# Altium PCB EasyEDA_ZX64_rev0.pcbdoc (part 3 of 3)
Units mil, origin at the board's own origin, x right, y up, seen from the top; angles counter-clockwise.
Board outline 12792.03 x 5307.23 mil, 2 copper layers (Top Layer, Bottom Layer); 152 components, 165 nets, 989 pads, 228 vias.
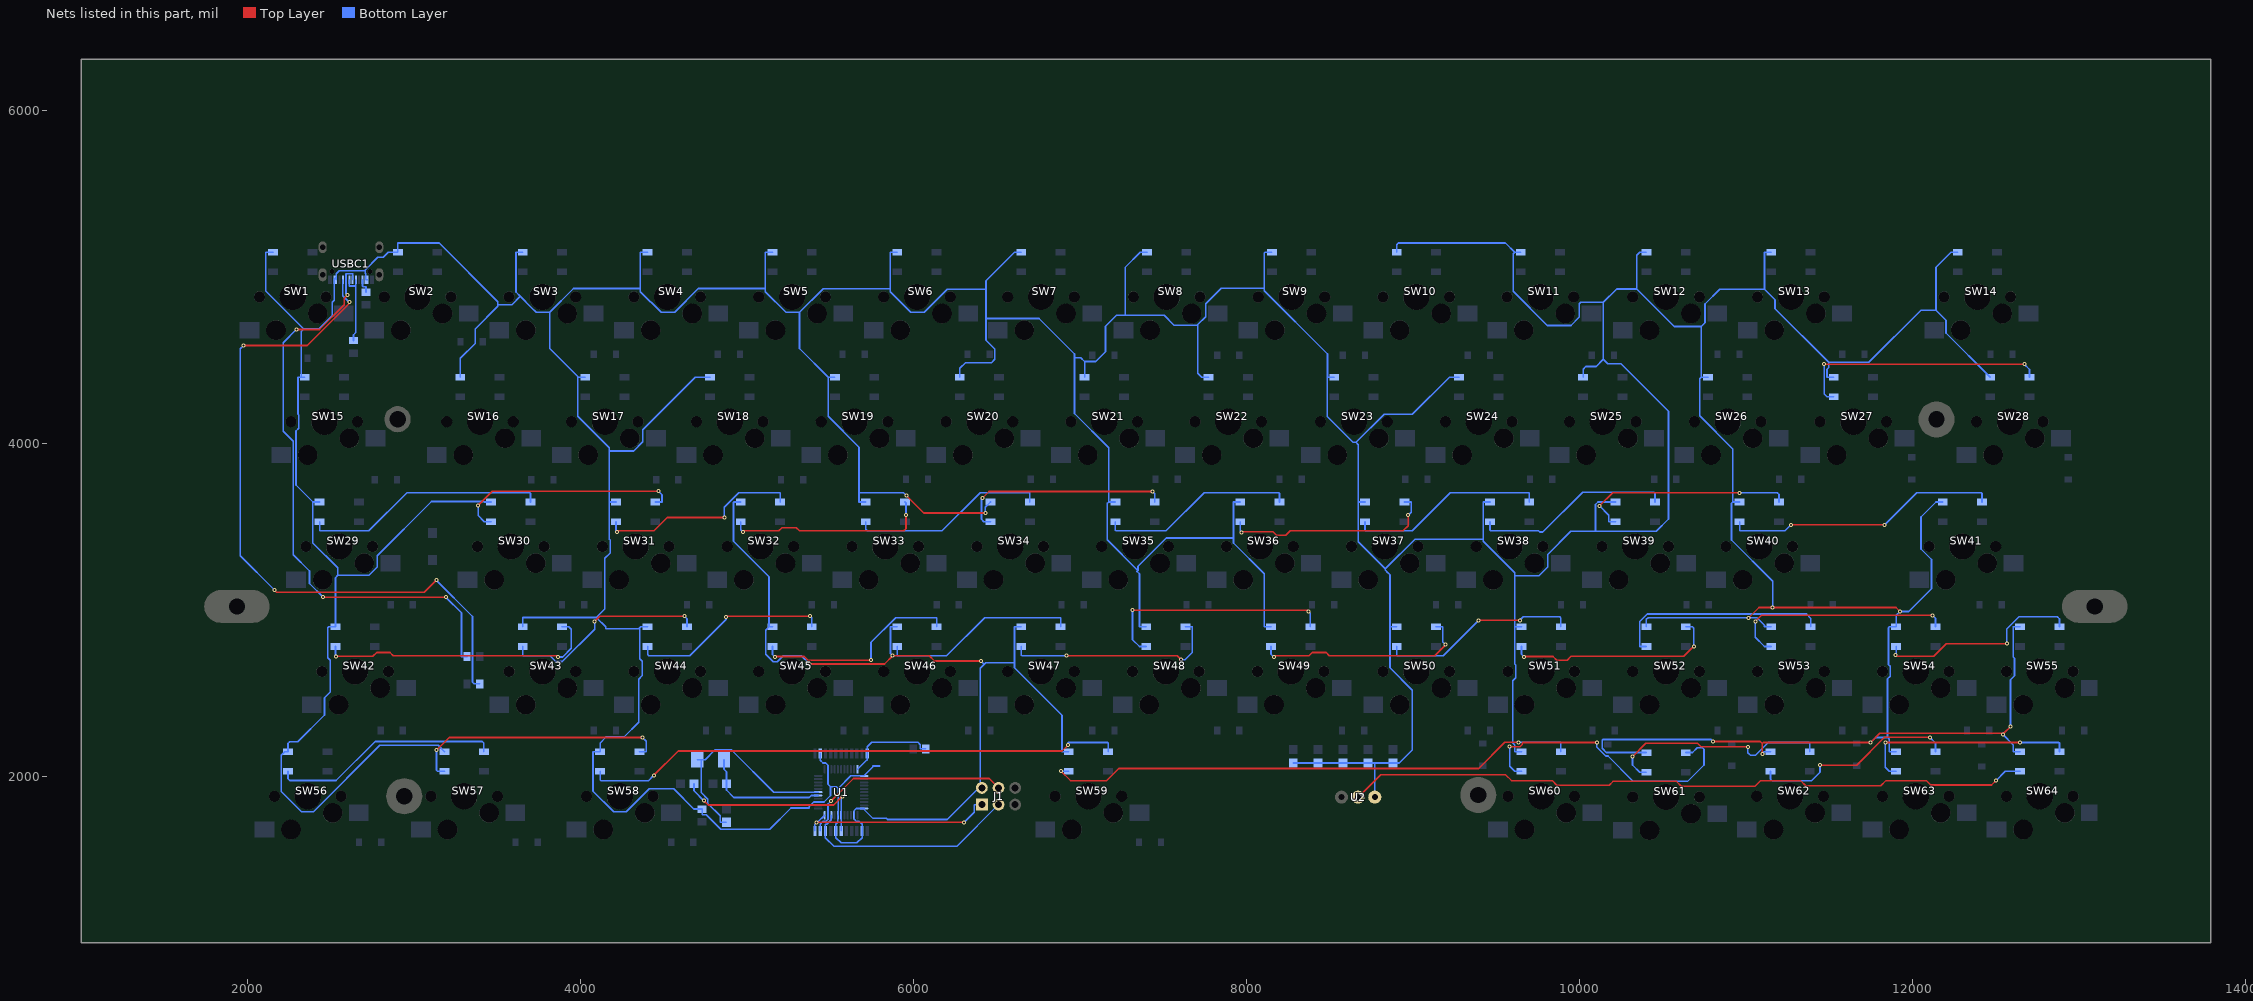
[diagram p3: the nets of this part, all layers, seen from the top]

## Via types
v1: diameter 24.02, hole 12.01, Top Layer to Bottom Layer, tented both sides, 228 vias

## Nets (pads, with @x,y where several pads share a name; then routed paths per layer and width w, separated by ;. In a path a pad name is that pad's centre, name@x,y a point inside that pad or via, vN(x,y) a via of type N, cw(c..) or ccw(c..) an arc to the next point about the centre after c; other vN are vias at no path point) (continued)
SW27_4: SW27.4 SW28.6 | length 1535.8
  Top Layer w10: v1(11469.71,4475.22) v1(12671.96,4475.22)
  Bottom Layer w10: v1(11469.71,4475.22) 11469.71,4296.43 11486.53,4279.61 SW27.4@11527.07,4279.61 ; v1(12671.96,4475.22) 12703.29,4443.89 SW28.6@12703.29,4397.72
SW29_4: SW29.4 SW30.6 | length 1468.1
  Bottom Layer w10: SW29.4@2432.07,3529.61 2432.07,3477.81 2435.7,3474.18 2727.54,3474.18 2956.51,3703.15 3695.38,3703.15 3698.29,3700.24 SW30.6@3698.29,3647.72
SW30_4: SW30.4 SW31.6 | length 1386.4
  Top Layer w10: v1(3384.38,3627.97) 3468.73,3712.32 v1(4467.71,3712.32)
  Bottom Layer w10: v1(3384.38,3627.97) 3384.38,3566.76 3421.53,3529.61 SW30.4@3462.07,3529.61 ; SW31.6@4448.29,3647.72 4488.78,3647.72 4488.78,3691.25 v1(4467.71,3712.32)
SW31_4: SW31.4 SW32.6 | length 1232.3
  Top Layer w10: v1(4219.26,3466.58) 4226.86,3474.18 4440.22,3474.18 4520.99,3554.95 v1(4862.69,3554.95)
  Bottom Layer w10: SW31.4@4212.07,3529.61 4212.07,3473.77 v1(4219.26,3466.58) ; v1(4862.69,3554.95) 4862.69,3615.55 4950.29,3703.15 5195.38,3703.15 5198.29,3700.24 SW32.6@5198.29,3647.72
SW32_4: SW32.4 SW33.6 | length 1233.5
  Top Layer w10: v1(4975.83,3466.74) 4983.27,3474.18 5190.22,3474.18 5209.46,3493.42 5295.19,3493.42 5314.43,3474.18 5940.22,3474.18 5953.83,3487.79 v1(5953.83,3568.16)
  Bottom Layer w10: SW32.4@4962.07,3529.61 4962.07,3480.5 v1(4975.83,3466.74) ; SW33.6@5948.29,3647.72 5953.83,3642.18 v1(5953.83,3568.16)
SW33_4: SW33.4 SW34.6 | length 1185.5
  Bottom Layer w10: SW33.4@5712.07,3529.61 5712.07,3484.3 5722.18,3474.19 6171,3474.19 6399.96,3703.15 6697.38,3703.15 6698.29,3702.24 SW34.6@6698.29,3647.72
SW34_4: SW34.4 SW35.6 | length 1297.2
  Top Layer w10: v1(6413.95,3672.2) 6452.67,3710.92 v1(7434.68,3710.92)
  Bottom Layer w10: v1(6413.95,3672.2) 6407.52,3665.77 6407.52,3543.62 6421.53,3529.61 SW34.4@6462.07,3529.61 ; v1(7434.68,3710.92) 7448.29,3697.31 SW35.6@7448.29,3647.72
SW35_4: SW35.4 SW36.6 | length 1188.1
  Bottom Layer w10: SW35.4@7212.07,3529.61 7212.07,3477.81 7215.7,3474.18 7516.29,3474.18 7745.26,3703.15 8195.38,3703.15 8198.29,3700.24 SW36.6@8198.29,3647.72
SW36_4: SW36.4 SW37.6 | length 1292.9
  Top Layer w10: v1(7970.91,3465.5) 7974.97,3469.56 8158.54,3469.56 8180.42,3447.68 8235.62,3447.68 8262.12,3474.18 8940.22,3474.18 8970.77,3504.73 v1(8970.77,3568.68)
  Bottom Layer w10: SW36.4@7962.07,3529.61 7962.07,3474.34 v1(7970.91,3465.5) ; SW37.6@8948.29,3647.72 8988.78,3647.72 8988.78,3586.69 v1(8970.77,3568.68)
SW37_4: SW37.4 SW38.6 | length 1188.1
  Bottom Layer w10: SW37.4@8712.07,3529.61 8712.07,3477.81 8715.7,3474.18 8995.11,3474.18 9224.08,3703.15 9695.38,3703.15 9698.29,3700.24 SW38.6@9698.29,3647.72
SW38_4: SW38.4 SW39.6 | length 1201.7
  Bottom Layer w10: SW38.4@9462.07,3529.61 9462.07,3477.81 9465.7,3474.18 9753.96,3474.18 9761.08,3467.06 9780.18,3467.06 10019.5,3706.38 10447.15,3706.38 10453.29,3700.24 SW39.6@10453.29,3647.72
SW39_4: SW39.4 SW40.6 | length 1318.6
  Top Layer w10: v1(10120.4,3624.43) 10199.12,3703.15 v1(10962.13,3703.15)
  Bottom Layer w10: v1(10120.4,3624.43) 10176.53,3568.3 10176.53,3529.61 SW39.4@10217.07,3529.61 ; v1(10962.13,3703.15) 11188.18,3703.15 11198.29,3693.04 SW40.6@11198.29,3647.72
SW40_4: SW40.4 SW41.6 | length 1658.6
  Top Layer w10: v1@11270.85,3510.62 v1(11833.3,3510.62)
  Bottom Layer w10: SW40.4@10962.07,3529.61 10962.07,3477.81 10965.7,3474.18 11234.41,3474.18 v1@11270.85,3510.62 ; v1(11833.3,3510.62) 12026.42,3703.74 12414.79,3703.74 12418.29,3700.24 SW41.6@12418.29,3647.72
  other v1: 11270.85,3510.62
SW42_4: SW42.4 SW43.6 | length 1692.7
  Top Layer w10: v1(2528.97,2720.47) 2751.48,2720.5 2774.48,2743.4 2854.28,2743.4 2873.58,2724.2 3411.58,2724.2 3855.18,2724.2 v1@3862.68,2716.7
  Bottom Layer w10: SW42.4@2527.07,2779.61 2527.07,2722.37 v1(2528.97,2720.47) ; v1@3862.73,2716.65 3892.1,2716.65 3943.85,2768.4 3943.85,2882.65 3928.78,2897.72 SW43.6@3888.29,2897.72
  other v1: 3862.73,2716.65
SW43_4: SW43.4 SW44.6 | length 1249.8
  Top Layer w10: v1(4083.81,2931.09) 4114.43,2961.71 v1(4623.01,2961.71)
  Bottom Layer w10: SW43.4@3652.07,2779.61 3652.07,2727.81 3655.7,2724.18 3815.82,2724.18 3850.87,2689.13 3889.41,2689.13 4083.81,2883.53 v1(4083.81,2931.09) ; v1(4623.01,2961.71) 4638.29,2946.43 SW44.6@4638.29,2897.72
SW44_4: SW44.4 SW45.6 | length 1201.6
  Top Layer w10: v1@4874.42,2957.25 4878.88,2961.71 v1(5378.16,2961.71)
  Bottom Layer w10: SW44.4@4402.07,2779.61 4402.07,2731.85 4409.74,2724.18 4655.01,2724.18 4874.42,2943.59 v1@4874.42,2957.25 ; v1(5378.16,2961.71) 5388.29,2951.58 SW45.6@5388.29,2897.72
  other v1: 4874.42,2957.25
SW45_4: SW45.4 SW46.6 | length 1274
  Top Layer w10: v1(5167.69,2715.56) 5171.69,2719.56 5343.6,2719.56 5365.48,2697.68 v1(5743.61,2697.68)
  Bottom Layer w10: SW45.4@5152.07,2779.61 5152.07,2731.18 v1(5167.69,2715.56) ; v1(5743.61,2697.68) 5743.61,2804.56 5892.2,2953.15 6135.38,2953.15 6138.29,2950.24 SW46.6@6138.29,2897.72
SW46_4: SW46.4 SW47.6 | length 1183.1
  Bottom Layer w10: SW46.4@5902.07,2779.61 5902.07,2727.81 5905.7,2724.18 6197.76,2724.18 6426.73,2953.15 6880.38,2953.15 6883.29,2950.24 SW47.6@6883.29,2897.72
SW47_4: SW47.4 SW48.6 | length 1302.6
  Top Layer w10: v1(6917.8,2724.18) 7583.24,2724.18 v1(7607.34,2700.08)
  Bottom Layer w10: SW47.4@6647.07,2779.61 6647.07,2727.81 6650.7,2724.18 v1(6917.8,2724.18) ; v1(7607.34,2700.08) 7630.09,2700.08 7673.85,2743.84 7673.85,2897.65 7673.78,2897.72 SW48.6@7633.29,2897.72
SW48_4: SW48.4 SW49.6 | length 1434
  Top Layer w10: v1(7314.98,2998.13) 8364.46,2998.13 v1@8373.34,2989.25
  Bottom Layer w10: v1(7314.98,2998.13) 7314.98,2821.16 7356.53,2779.61 SW48.4@7397.07,2779.61 ; v1@8373.34,2989.25 8383.29,2979.3 SW49.6@8383.29,2897.72
  other v1: 8373.34,2989.25
SW49_4: SW49.4 SW50.6 | length 1302.7
  Top Layer w10: v1(8163.95,2716.29) 8171.84,2724.18 8375.22,2724.18 8394.46,2743.42 8478.31,2743.42 8497.55,2724.18 9130.22,2724.18 9194.16,2788.12 v1(9194.16,2791.57)
  Bottom Layer w10: SW49.4@8147.07,2779.61 8147.07,2733.17 v1(8163.95,2716.29) ; SW50.6@9138.29,2897.72 9178.78,2897.72 9178.78,2806.95 v1(9194.16,2791.57)
SW50_4: SW50.4 SW51.6 | length 1193.5
  Top Layer w10: v1(9392.57,2936.54) v1@9641.65,2936.54
  Bottom Layer w10: SW50.4@8902.07,2779.61 8902.07,2727.81 8905.7,2724.18 9182.09,2724.18 9392.57,2934.66 v1(9392.57,2936.54) ; v1@9641.65,2936.54 9662.77,2957.66 9881.77,2957.66 9888.29,2951.14 SW51.6@9888.29,2897.72
  other v1: 9641.65,2936.54
SW51_4: SW51.4 SW52.6 | length 1293.4
  Top Layer w10: v1(9668.09,2716.89) 9670.76,2719.56 9841.44,2719.56 9863.32,2697.68 9925.62,2697.68 9948.84,2720.9 10626.94,2720.9 v1(10686.83,2780.79)
  Bottom Layer w10: SW51.4@9652.07,2779.61 9652.07,2732.91 v1(9668.09,2716.89) ; SW52.6@10638.29,2897.72 10678.78,2897.72 10686.83,2889.67 v1(10686.83,2780.79)
SW52_4: SW52.4 SW53.6 | length 1298.5
  Bottom Layer w10: SW52.4@10402.07,2779.61 10361.53,2779.61 10361.46,2779.68 10361.46,2929.45 10406.55,2974.54 11363.99,2974.54 11388.29,2950.24 SW53.6@11388.29,2897.72
SW53_4: SW53.4 SW54.6 | length 1370.2
  Top Layer w10: v1(11056.69,2930.2) 11093.5,2967.01 v1(12121.52,2967.01)
  Bottom Layer w10: v1(11056.69,2930.2) 11056.69,2834.45 11111.53,2779.61 SW53.4@11152.07,2779.61 ; v1(12121.52,2967.01) 12138.29,2950.24 SW54.6@12138.29,2897.72
SW54_4: SW54.4 SW55.6 | length 1242.9
  Top Layer w10: v1(11898.23,2729.56) 11906.16,2721.63 12127.67,2721.63 12202.42,2796.38 v1(12567.67,2796.38)
  Bottom Layer w10: v1(11898.23,2729.56) 11902.07,2733.4 SW54.4@11902.07,2779.61 ; v1(12567.67,2796.38) 12567.67,2885.48 12640.1,2957.91 12870.74,2957.91 12883.29,2945.36 SW55.6@12883.29,2897.72
SW56_4: SW56.4 SW57.6 | length 1379.5
  Bottom Layer w10: SW56.4@2242.07,2029.61 2242.07,1984.3 2252.18,1974.19 2530.38,1974.19 2765.58,2209.39 3409.14,2209.39 3418.29,2200.24 SW57.6@3418.29,2147.72
SW57_4: SW57.4 SW58.6 | length 1575.1
  Top Layer w10: v1(3133.91,2157.28) 3209.8,2233.17 v1(4370.64,2233.17)
  Bottom Layer w10: v1(3133.91,2157.28) 3133.91,2037.23 3141.53,2029.61 SW57.4@3182.07,2029.61 ; SW58.6@4353.29,2147.72 4393.78,2147.72 4393.78,2210.03 v1(4370.64,2233.17)
SW58_4: SW58.4 SW59.6 | length 3260.9
  Top Layer w10: v1(4439.36,2005.51) 4585.31,2151.46 6891.9,2151.46 v1@6927.09,2186.65
  Bottom Layer w10: SW58.4@4117.07,2029.61 4117.07,1977.81 4120.7,1974.18 4408.03,1974.18 v1(4439.36,2005.51) ; v1@6927.09,2186.65 6927.09,2199.92 6930.32,2203.15 7165.38,2203.15 7168.29,2200.24 SW59.6@7168.29,2147.72
  other v1: 6927.09,2186.65
SW59_4: SW59.4 SW60.6 | length 3225.4
  Top Layer w10: v1(6884.4,2031.84) 6942.06,1974.18 7160.22,1974.18 7232.38,2046.34 9393.99,2046.34 9551.38,2203.73 v1(9632.26,2203.73)
  Bottom Layer w10: v1(6884.4,2031.84) 6886.63,2029.61 6891.53,2029.61 SW59.4@6932.07,2029.61 ; v1(9632.26,2203.73) 9884.8,2203.73 9888.29,2200.24 SW60.6@9888.29,2147.72
SW60_4: SW60.4 SW61.6 | length 1758.2
  Top Layer w10: v1(9580.99,2177.9) 9643.16,2177.9 9655.7,2190.44 9655.7,2200.24 9658.6,2203.14 v1(10104.19,2203.14)
  Bottom Layer w10: v1(9580.99,2177.9) 9580.99,2060.15 9611.53,2029.61 SW60.4@9652.07,2029.61 ; v1(10104.19,2203.14) 10104.19,2176.28 10158.36,2122.11 10171.01,2122.11 10323.94,1969.18 10649.07,1969.18 10747.86,2067.97 10747.86,2162.95 10739.27,2171.54 10707.6,2171.54 10678.78,2142.72 SW61.6@10638.29,2142.72
SW61_4: SW61.4 SW62.6 | length 1386.2
  Top Layer w10: v1(10318.72,2118.02) 10398.85,2198.15 10708.63,2198.15 10729.71,2177.07 v1(11011.35,2177.07)
  Bottom Layer w10: v1(10318.72,2118.02) 10318.72,2067.42 10361.53,2024.61 SW61.4@10402.07,2024.61 ; v1(11011.35,2177.07) 11011.35,2141.7 11027.65,2125.4 11056.98,2125.4 11134.73,2203.15 11380.38,2203.15 11383.29,2200.24 SW62.6@11383.29,2147.72
SW62_4: SW62.4 SW63.6 | length 1239.9
  Top Layer w10: v1(11444.72,2067.03) 11664.84,2067.03 11831.83,2234.02 v1(12104.51,2234.02)
  Bottom Layer w10: SW62.4@11147.07,2029.61 11147.07,1984.14 11157.03,1974.18 11394.52,1974.18 11444.72,2024.38 v1(11444.72,2067.03) ; v1(12104.51,2234.02) 12138.29,2200.24 SW63.6@12138.29,2147.72
SW63_4: SW63.4 SW64.6 | length 1323.5
  Top Layer w10: v1(11837.3,2203.15) v1(12646.73,2203.15)
  Bottom Layer w10: v1(11837.3,2203.15) 11837.3,2053.84 11861.53,2029.61 SW63.4@11902.07,2029.61 ; v1(12646.73,2203.15) 12879.8,2203.15 12883.29,2199.66 SW64.6@12883.29,2147.72
SW64_4: SW64.4 U2.2 | length 4165.5
  Top Layer w10: U2.2@8670.18,1875 8805.31,2010.13 9555.57,2010.13 9591.52,1974.18 9835.88,1974.18 9863.37,1946.69 10178.76,1946.69 10201.25,1969.18 10583.24,1969.18 10612.25,1940.17 11054.44,1940.17 11088.45,1974.18 11328.24,1974.18 11359.36,1943.06 11809.83,1943.06 11840.95,1974.18 12083.24,1974.18 12110.02,1947.4 12475.6,1947.4 v1(12503.19,1974.99)
  Bottom Layer w10: v1(12503.19,1974.99) 12557.81,2029.61 SW64.4@12647.07,2029.61
U1_6: C6.2 U1.6 | length 1200.1
  Top Layer w10: v1(4740.24,1853.34) 4766.03,1827.55 5519.57,1827.55 v1(5571.53,1879.51)
  Bottom Layer w10: C6.2@4680.73,1955 4680.73,1912.85 v1(4740.24,1853.34) ; U1.6@5564.59,1672.12 5564.59,1692.38 5564.59,1712.64 5564.51,1712.72 U1.6@5564.51,1766.7 5564.51,1872.49 v1(5571.53,1879.51)
U1_9: J1.3 U1.9 | length 1319.9
  Bottom Layer w10: U1.9@5505.45,1766.7 5505.45,1739.21 5478.88,1712.64 5470.1,1712.64 5470.1,1692.38 U1.9@5470.1,1672.12 5470.1,1631.61 5521.67,1580.04 6260.22,1580.04 J1.3@6510.18,1830
U1_10: J1.4 U1.10 | length 1302.6
  Top Layer w10: v1(5504.58,1852.51) 5638.62,1986.55 6453.63,1986.55 J1.4@6510.18,1930
  Bottom Layer w10: U1.10@5438.6,1672.12 5438.6,1712.64 5454.65,1728.69 5472.22,1728.69 5485.77,1742.24 U1.10@5485.77,1766.7 5485.77,1833.7 v1(5504.58,1852.51)
U1_11: J1.1 U1.11 | length 1187.6
  Top Layer w10: v1(5416.55,1723.26) v1(6303.44,1723.26)
  Bottom Layer w10: U1.11@5407.11,1672.12 5407.11,1692.38 5407.11,1712.64 5416.55,1722.08 v1(5416.55,1723.26) 5422.64,1723.26 U1.11@5466.08,1766.7 ; v1(6303.44,1723.26) 6363.76,1783.58 6363.76,1830 J1.1@6410.18,1830
U1_16: C7.2 U1.16 X1.1 | length 763.1
  Bottom Layer w10: X1.1@4860.89,2100 4860.89,2041.76 4875.73,2026.92 C7.2@4875.73,1955 4875.73,1917.44 4920.26,1872.91 U1.16@5332.3,1872.91 5372.82,1872.91 5384.72,1884.81 U1.16@5426.71,1884.81
U1_17: C8.2 U1.17 X1.2 | length 1316.9
  Bottom Layer w10: X1.2@4699.47,2100 X1.2@4723.67,2100 ; C8.2@4875.18,1724.45 4837.62,1724.45 4837.62,1762.01 4763.3,1836.33 4763.3,1862.9 4723.67,1902.53 X1.2@4723.67,2100 ; U1.17@5426.71,1904.49 5426.63,1904.41 U1.17@5332.3,1904.41 5160.31,1904.41 4906.42,2158.3 4806.16,2158.3 4747.86,2100 X1.2@4723.67,2100
U1_33: R2.1 U1.33 | length 555.4
  Bottom Layer w10: U1.33@5662.93,2042.29 5716.82,2096.18 5722.07,2096.18 5722.07,2135.77 U1.33@5722.07,2136.69 5722.07,2177.21 5748.68,2203.82 6026.08,2203.82 6039.94,2189.96 6039.94,2165 R2.1@6073.22,2165
USBC1_A5: R5.1 USBC1.A5 | length 4217.6
  Top Layer w10: v1(1974.92,4588.1) 2357.81,4588.1 2610.11,4840.4 v1(2610.11,4848.11) ; v1(2160.37,3119.19) 2173.28,3106.28 3060.44,3106.28 v1(3132.48,3178.32)
  Bottom Layer w10: v1(1974.92,4588.1) 1955.52,4568.7 1955.52,3324.04 v1(2160.37,3119.19) ; USBC1.A5@2570.97,4982.2 2570.97,4887.25 v1(2610.11,4848.11) ; v1(3132.48,3178.32) 3350.49,2960.31 3350.49,2564.45 3359.94,2555 R5.1@3393.22,2555
USBC1_B5: R4.2 USBC1.B5 | length 92.7
  Bottom Layer w10: USBC1.B5@2689.08,4982.2 2689.08,4945.62 2693.37,4941.33 2710.18,4941.33 R4.2@2710.18,4908.04
USBC1_B6: R3.1 USBC1.A6 USBC1.B6 | length 445.8
  Bottom Layer w10: USBC1.A6@2610.34,4982.2 2610.34,4945.62 2610.82,4945.14 2649.23,4945.14 ; R3.1@2635.18,4618.04 2635.18,4651.33 2649.23,4665.38 2649.23,4945.14 ; USBC1.B6@2649.71,4982.2 2649.71,4945.62 2649.23,4945.14
USBC1_B7: R6.2 USBC1.A7 USBC1.B7 | length 3528.6
  Top Layer w10: v1(2291.92,4683.76) 2430.76,4683.76 2579.15,4832.15 2579.15,4871.18 v1(2599.4,4891.43) ; v1(2452.96,3076.31) v1(3189.9,3076.31)
  Bottom Layer w10: v1(2291.92,4683.76) 2212.64,4604.48 2212.64,4072.75 2273.63,4011.76 2273.63,3330.58 2370.83,3233.38 2370.83,3158.44 v1(2452.96,3076.31) ; v1(2599.4,4891.43) 2590.65,4900.18 2590.65,4982.2 2590.65,5000.49 2590.65,5018.78 2590.72,5018.85 2629.95,5018.85 2630.02,5018.78 2630.02,5000.49 USBC1.A7@2630.02,4982.2 ; v1(3189.9,3076.31) 3283.85,2982.36 3283.85,2720 R6.2@3317.14,2720
VCC: C1.2 C2.2 C3.2 C4.2 C5.2 J1.2 R1.1 SW1.3 SW2.3 SW3.3 SW4.3 SW5.3 SW6.3 SW7.3 SW8.3 SW9.3 SW10.3 SW11.3 SW12.3 SW13.3 SW14.3 SW15.3 SW16.3 SW17.3 SW18.3 SW19.3 SW20.3 SW21.3 SW22.3 SW23.3 SW24.3 SW25.3 SW26.3 SW27.3 SW28.3 SW29.3 SW30.3 SW31.3 SW32.3 SW33.3 SW34.3 SW35.3 SW36.3 SW37.3 SW38.3 SW39.3 SW40.3 SW41.3 SW42.3 SW43.3 SW44.3 SW45.3 SW46.3 SW47.3 SW48.3 SW49.3 SW50.3 SW51.3 SW52.3 SW53.3 SW54.3 SW55.3 SW56.3 SW57.3 SW58.3 SW59.3 SW60.3 SW61.3 SW62.3 SW63.3 SW64.3 U1.2 U1.7 U1.14 U1.24 U1.34 U1.44 U2.3 USBC1.A4 USBC1.A9 USBC1.B4 USBC1.B9 | length 62607.8
  Top Layer w10: v1(5375.18,2674.56) 5824.91,2674.56 v1(5874.53,2724.18) 6093.72,2724.18 6125.59,2692.31 v1(6404.7,2692.31) ; v1(5956.04,3687.01) 6061.81,3581.24 v1(6430.58,3581.24) ; v1(10802.49,2209) 11085.72,2209 11098,2196.72 ; v1(11015.55,2950.89) 11078.53,3013.87 v1(11160.87,3013.87) 11901.8,3013.87 v1(11925.6,2990.07) ; v1(11098,2133.23) 11098,2196.72 ; v1(12543.07,2251.72) v1@12543.07,2258.18 ; v1(12589.49,2298.14) 12549.53,2258.18 v1@12543.07,2258.18 ; 11098,2196.72 11104.43,2203.15 v1(11748.78,2203.15) 11803.81,2258.18 v1@12543.07,2258.18
  Bottom Layer w10: SW1.3@2152.07,5147.72 2111.53,5147.72 2108.81,5145 2108.81,4914.72 2336.8,4686.73 ; SW15.3@2342.07,4397.72 SW15.3@2321.8,4397.72 ; SW29.3@2432.07,3647.72 2391.53,3647.72 ; USBC1.B9@2531.59,4982.2 USBC1.B9@2531.6,4998.27 ; USBC1.A9@2720.58,4982.2 USBC1.B4@2708.76,4982.2 2708.76,5018.78 2706.35,5021.19 2706.35,5036.49 ; SW57.3@3182.07,2147.72 3143.55,2186.24 2793.83,2186.24 2394.67,1787.08 2323.14,1787.08 2201.31,1908.91 2201.31,2127.23 2221.8,2147.72 SW56.3@2242.07,2147.72 2242.07,2196.59 2252.83,2207.35 2300.03,2207.35 2460.91,2368.23 2460.91,2471.29 2496.14,2506.52 2496.14,2697.22 2480.87,2712.49 2480.87,2892.06 2486.53,2897.72 SW42.3@2527.07,2897.72 2527.07,3193.3 2540.51,3206.74 ; SW16.3@3277.07,4397.72 3277.07,4511.1 3365.99,4600.02 3365.99,4687.03 3502.29,4823.33 3502.29,4831.62 ; SW30.3@3462.07,3647.72 3421.53,3647.72 3418.22,3651.03 3104.38,3651.03 2778.45,3325.1 2778.45,3257.25 2727.94,3206.74 2540.51,3206.74 ; SW43.3@3652.07,2897.72 3652.07,2953.09 3653.13,2954.15 4093.83,2954.15 ; SW3.3@3652.07,5147.72 3611.53,5147.72 3611.11,5147.3 3611.11,4909.11 3637.39,4882.84 ; SW17.3@4027.07,4397.72 3986.53,4397.72 ; SW31.3@4212.07,3647.72 4171.53,3647.72 ; SW44.3@4402.07,2897.72 4361.53,2897.72 4355.33,2891.52 ; SW4.3@4402.07,5147.72 4361.53,5147.72 4358.8,5144.99 4358.8,4930.06 ; SW18.3@4777.07,4397.72 4688.93,4397.72 4373.45,4082.24 4373.45,4008.93 4318.72,3954.2 4171.53,3954.2 ; SW32.3@4962.07,3647.72 4921.53,3647.72 4918.22,3644.41 4918.22,3412.83 5131.8,3199.25 SW45.3@5131.8,2897.72 ; SW45.3@5152.07,2897.72 SW45.3@5131.8,2897.72 ; SW5.3@5152.07,5147.72 5111.53,5147.72 5108.8,5144.99 5108.8,4930.06 ; v1(5375.18,2674.56) 5325.56,2724.18 5217.09,2724.18 5180.78,2687.87 5156.95,2687.87 5111.46,2733.36 5111.46,2877.38 SW45.3@5131.8,2897.72 ; U1.24@5438.6,2136.69 5438.6,2096.18 5455.25,2079.53 5472.82,2079.53 5485.77,2066.58 U1.24@5485.77,2042.29 5485.77,1952.82 5500.95,1937.64 ; SW19.3@5527.07,4397.72 5486.53,4397.72 ; SW33.3@5712.07,3647.72 5671.53,3647.72 5671.53,3704.16 ; U1.34@5796.87,2061.89 5756.35,2061.89 5756.35,2056.97 U1.34@5702.3,2002.92 5623.35,2002.92 5547.54,1927.11 ; v1(5874.53,2724.18) 5861.46,2737.25 5861.46,2897.65 5861.53,2897.72 SW46.3@5902.07,2897.72 ; SW6.3@5902.07,5147.72 5861.53,5147.72 5859.66,5145.85 5859.66,4929.36 ; v1(5956.04,3687.01) 5938.89,3704.16 5671.53,3704.16 ; SW20.3@6277.07,4397.72 6277.07,4450.52 6311.19,4484.64 6467.42,4484.64 6487.03,4504.25 6487.03,4567.05 6434.83,4619.25 6434.83,4750.12 ; v1(6404.7,2692.31) 6424.32,2672.69 ; J1.2@6410.18,1930 J1.2@6401.11,1939.07 ; v1(6430.58,3581.24) 6430.58,3616.23 SW34.3@6462.07,3647.72 ; SW47.3@6647.07,2897.72 6606.53,2897.72 6606.46,2897.65 6606.46,2681.65 ; SW7.3@6647.07,5147.72 6606.53,5147.72 6434.83,4976.02 6434.83,4925.55 ; SW59.3@6932.07,2147.72 6891.53,2147.72 6891.53,2366.67 6606.46,2651.74 6606.46,2681.65 ; SW21.3@7027.07,4397.72 7027.07,4491.46 ; SW35.3@7212.07,3647.72 7171.53,3647.72 ; SW48.3@7397.07,2897.72 7356.53,2897.72 7356.53,3215.76 7342.32,3229.97 7347.94,3235.59 ; SW8.3@7402.07,5147.72 7361.53,5147.72 7270.39,5056.58 7270.39,4768.66 ; SW22.3@7772.07,4397.72 7731.53,4397.72 7707.85,4421.4 7707.85,4708.99 ; SW36.3@7962.07,3647.72 7921.53,3647.72 7921.46,3647.65 7921.46,3431.11 ; SW49.3@8147.07,2897.72 8106.53,2897.72 8106.53,3216.67 7921.46,3401.74 7921.46,3431.11 ; SW9.3@8152.07,5147.72 8111.53,5147.72 8106.79,5142.98 8106.79,4931.18 ; C1.2@8280.18,2079.45 8430.18,2079.45 8580.18,2079.45 8730.18,2079.45 8770.18,2079.45 ; SW23.3@8527.07,4397.72 8486.53,4397.72 ; SW37.3@8712.07,3647.72 8671.53,3647.72 ; U2.3@8770.18,1875 8770.18,2079.45 ; 8834.02,3246.85 8834.02,3239.18 8842.77,3230.43 8842.77,3229.52 8861.5,3210.79 8861.5,2897.72 8861.46,2897.68 8861.46,2651.74 8995.67,2517.53 8995.67,2157.37 8917.75,2079.45 8880.18,2079.45 8770.18,2079.45 ; 8861.53,2897.72 SW50.3@8902.07,2897.72 ; SW10.3@8902.07,5147.72 8902.07,5193.03 8912.18,5203.14 9555.08,5203.14 9610.5,5147.72 ; SW24.3@9277.07,4397.72 9236.53,4397.72 9218.87,4397.72 8996.32,4175.17 8827.35,4175.17 8657.83,4005.65 ; SW38.3@9462.07,3647.72 9421.53,3647.72 9421.46,3647.65 9421.46,3424.56 ; SW11.3@9647.07,5147.72 9610.5,5147.72 ; SW60.3@9652.07,2147.72 9611.53,2147.72 9611.53,2188.26 9598.78,2201.01 9598.78,2573.4 9617,2591.62 9617,2669.02 9611.46,2674.56 9611.46,2897.65 9611.53,2897.72 ; SW51.3@9652.07,2897.72 9611.53,2897.72 ; SW25.3@10022.07,4397.72 10022.07,4445.92 10037.7,4461.55 10100.32,4461.55 10143.16,4504.39 ; SW39.3@10217.07,3647.72 10176.53,3647.72 10111.08,3647.72 10095.8,3632.44 10095.8,3471.87 ; SW61.3@10402.07,2142.72 10161.77,2142.72 10136.48,2168.01 10136.48,2218.48 10139.39,2221.39 10790.1,2221.39 v1(10802.49,2209) ; SW52.3@10402.07,2897.72 10402.07,2943.03 10412.3,2953.26 v1@11015.55,2953.26 ; SW12.3@10402.07,5147.72 10361.53,5147.72 10343.87,5130.06 10343.87,4927.06 ; SW26.3@10772.07,4397.72 10731.53,4397.72 ; SW40.3@10962.07,3647.72 10921.53,3647.72 ; v1(11015.55,2950.89) v1@11015.55,2953.26 ; v1(11098,2133.23) 11106.53,2141.76 11106.53,2147.72 SW62.3@11147.07,2147.72 ; SW53.3@11152.07,2897.72 11111.53,2897.72 11111.53,2907.99 11066.26,2953.26 v1@11015.55,2953.26 ; SW13.3@11152.07,5147.72 11111.53,5147.72 11111.46,5147.65 11111.46,4925.82 ; v1(11160.87,3013.87) 11160.87,3171.57 10913.4,3419.04 10913.4,3639.59 10921.53,3647.72 ; SW27.3@11527.07,4397.72 11486.53,4397.72 11486.53,4445.76 11496.66,4455.89 11496.66,4486.3 ; v1(11748.78,2203.15) 11778.91,2233.28 11849.97,2233.28 ; SW63.3@11902.07,2147.72 11861.53,2147.72 11861.53,2221.72 11849.97,2233.28 ; SW41.3@12182.07,3647.72 12141.53,3647.72 12051.68,3557.87 12051.68,3365.42 12114.62,3302.48 12114.62,3125.86 11978.83,2990.07 v1(11925.6,2990.07) 11902.07,2966.54 SW54.3@11902.07,2897.72 11861.53,2897.72 11856.29,2892.48 11856.29,2669.99 11866.09,2660.19 11866.09,2601.47 11849.97,2585.35 11849.97,2233.28 ; SW14.3@12272.07,5147.72 12231.53,5147.72 12141.7,5057.89 12141.7,4800.35 ; SW28.3@12467.07,4397.72 12201.73,4663.06 12201.73,4740.32 12141.7,4800.35 ; v1(12543.07,2251.72) 12606.53,2188.26 12606.53,2147.72 SW64.3@12647.07,2147.72 ; v1(12589.49,2298.14) 12589.49,2579.87 12613.24,2603.62 12613.24,2709.26 12605.68,2716.82 12605.68,2896.87 12606.53,2897.72 SW55.3@12647.07,2897.72 ; SW15.3@2321.8,4397.72 2321.8,4671.73 2336.8,4686.73 ; SW15.3@2321.8,4397.72 2301.53,4397.72 2301.46,4397.65 2301.46,4174.56 2307,4169.02 2307,4091.62 2289.69,4074.31 2289.69,3749.56 2391.53,3647.72 ; 2336.8,4686.73 2426.57,4686.73 2506.75,4766.91 2506.75,4847.24 2519.79,4860.28 USBC1.A4@2519.79,4982.2 2519.79,4986.46 USBC1.B9@2531.6,4998.27 ; 2391.53,3647.72 2391.46,3647.65 2391.46,3401.74 2540.51,3252.69 2540.51,3206.74 ; USBC1.B9@2531.6,4998.27 2531.6,5018.78 2549.31,5036.49 2706.35,5036.49 ; 2706.35,5036.49 2706.35,5041.59 2781.84,5117.08 2813.34,5117.08 2843.98,5147.72 2861.53,5147.72 SW2.3@2902.07,5147.72 2902.07,5203.09 2902.12,5203.14 3150.58,5203.14 3502.29,4851.43 3502.29,4831.62 ; 3502.29,4831.62 3586.17,4831.62 3637.39,4882.84 ; 3637.39,4882.84 3704.95,4815.27 3733.15,4787.08 3814.24,4787.08 ; 3814.24,4787.08 3957.22,4930.06 4358.8,4930.06 ; 3814.24,4787.08 3814.24,4570.01 3986.53,4397.72 ; 3986.53,4397.72 3983.04,4394.23 3983.04,4162.18 4171.53,3973.69 4171.53,3954.2 ; 4093.83,2954.15 4150.26,2897.72 4150.26,2885.32 4349.13,2885.32 4355.33,2891.52 ; 4093.83,2954.15 4144.62,3004.94 4144.62,3309.24 4177,3341.62 4177,3419.02 4171.46,3424.56 4171.46,3647.65 4171.53,3647.72 ; 4171.53,3647.72 4171.53,3954.2 ; 4355.33,2891.52 4355.33,2706.11 4369.76,2691.68 4369.76,2605.14 4348.21,2583.59 4348.21,2323.86 4259.96,2235.61 4152.45,2235.61 4117.07,2200.23 SW58.3@4117.07,2147.72 4076.53,2147.72 4074.47,2145.66 4074.47,1910.77 4199.06,1786.18 4274.35,1786.18 4412.83,1924.66 4558.56,1924.66 4680.18,1803.04 R1.1@4730.18,1803.04 4730.18,1769.76 4754.38,1769.76 4841.81,1682.33 5135.48,1682.33 5263.07,1809.92 U1.14@5332.3,1809.92 5372.82,1809.92 5372.82,1818.7 5399.56,1845.44 U1.14@5426.71,1845.44 5462.12,1845.44 5500.95,1884.27 5500.95,1937.64 ; 4358.8,4930.06 4358.8,4911.42 4483.14,4787.08 4564.24,4787.08 4707.22,4930.06 5108.8,4930.06 ; 5108.8,4930.06 5108.8,4911.42 5233.14,4787.08 5314.24,4787.08 ; 5314.24,4787.08 5314.24,4570.01 5486.53,4397.72 ; 5314.24,4787.08 5456.52,4929.36 5859.66,4929.36 ; 5486.53,4397.72 5486.46,4397.65 5486.46,4162.08 5671.53,3977.01 5671.53,3704.16 ; 5500.95,1937.64 5537.01,1937.64 5547.54,1927.11 ; 5547.54,1927.11 5547.54,1769.42 U1.7@5544.82,1766.7 5544.82,1724.37 5533.09,1712.64 5533.09,1692.38 U1.7@5533.09,1672.12 5533.09,1631.61 5564.6,1600.1 5659.06,1600.1 5690.57,1631.61 U1.2@5690.57,1672.12 5690.57,1712.64 5674.42,1728.79 5657.02,1728.79 5643.25,1742.56 U1.2@5643.25,1766.7 5643.25,1794.31 5655.01,1806.07 U1.44@5702.3,1806.07 5702.3,1800.98 5756.35,1746.93 5776.61,1746.93 U1.44@5796.87,1746.93 5837.39,1746.93 5843.53,1740.79 6202.83,1740.79 J1.2@6401.11,1939.07 ; 5859.66,4929.36 5859.66,4910.56 5983.14,4787.08 6064.24,4787.08 6202.71,4925.55 6434.83,4925.55 ; J1.2@6401.11,1939.07 6401.11,2649.48 6424.32,2672.69 ; 6424.32,2672.69 6433.28,2681.65 6606.46,2681.65 ; 6434.83,4750.12 6753.05,4750.12 6966.43,4536.74 6966.43,4514.1 ; 6434.83,4750.12 6434.83,4925.55 ; 6966.43,4514.1 6966.43,4178.8 7171.53,3973.7 7171.53,3647.72 ; 6966.43,4514.1 7004.43,4514.1 7027.07,4491.46 ; 7027.07,4491.46 7094.6,4491.46 7153.21,4550.07 7153.21,4702.75 7219.12,4768.66 7270.39,4768.66 ; 7171.53,3647.72 7163.07,3639.26 7163.07,3420.46 7347.94,3235.59 ; 7270.39,4768.66 7504.87,4768.66 7564.54,4708.99 7707.85,4708.99 ; 7347.94,3235.59 7347.94,3260.77 7518.28,3431.11 7921.46,3431.11 ; 7707.85,4708.99 7707.85,4713.44 7754.41,4760 7754.41,4838.2 7847.39,4931.18 8106.79,4931.18 ; 8106.79,4931.18 8106.79,4916.74 8486.53,4537 8486.53,4397.72 ; 8486.53,4397.72 8484.19,4395.38 8484.19,4161.04 8639.58,4005.65 8657.83,4005.65 ; 8657.83,4005.65 8671.53,3991.95 8671.53,3647.72 ; 8671.53,3647.72 8671.46,3647.65 8671.46,3409.42 8834.03,3246.86 9011.73,3424.56 9421.46,3424.56 ; 9421.46,3424.56 9421.46,3412.07 9611.53,3222 9611.53,3205.56 ; 9610.5,5147.72 9601.84,5139.06 9601.84,4913.86 9807.35,4708.35 9949.02,4708.35 9999.41,4758.74 9999.41,4838.2 10007.89,4846.68 10143.16,4846.68 ; 9611.53,2897.72 9611.53,3205.56 ; 9611.53,3205.56 9756.76,3205.56 9808.45,3257.25 9808.45,3332.24 9948.08,3471.87 10095.8,3471.87 ; 10095.8,3471.87 10461.38,3471.87 10534.59,3545.08 10534.59,4192.01 10249.04,4477.56 10169.99,4477.56 10143.16,4504.39 ; 10143.16,4504.39 10143.16,4846.68 ; 10143.16,4846.68 10223.54,4927.06 10343.87,4927.06 ; 10343.87,4927.06 10568.96,4701.97 10731.53,4701.97 ; 10731.53,4397.72 10731.53,4701.97 ; 10731.53,4397.72 10722.71,4388.9 10722.71,4165 10921.53,3966.18 10921.53,3647.72 ; 10731.53,4701.97 10754.4,4724.84 10754.4,4837.18 10843.04,4925.82 11111.46,4925.82 ; 11111.46,4925.82 11174.83,4862.45 11174.83,4808.13 11496.66,4486.3 ; 11496.66,4486.3 11737.45,4486.3 12051.5,4800.35 12141.7,4800.35
pads on no net: SW1. SW2. SW3. SW4. SW5. SW6. SW7. SW8. SW9. SW10. SW11. SW12. SW13. SW14. SW15. SW16. SW17. SW18. SW19. SW20. SW21. SW22. SW23. SW24. SW25. SW26. SW27. SW28. SW29. SW30. SW31. SW32. SW33. SW34. SW35. SW36. SW37. SW38. SW39. SW40. SW41. SW42. SW43. SW44. SW45. SW46. SW47. SW48. SW49. SW50. SW51. SW52. SW53. SW54. SW55. SW56. SW57. SW58. SW59. SW60. SW61. SW62. SW63. SW64. U1.31 U1.32 U1.42 USBC1. USBC1.A8 USBC1.B8

## Polygon pours and split planes (outlines as drawn)
GND on Bottom Layer (solid): 1905.18,1510 1900.18,1515 1900.18,5250 13135.18,5250 13140.18,5245 13140.18,1515 13135.18,1510 1905.18,1510
GND on Top Layer (solid): 1900.18,5250 13135.18,5250 13135.18,1515 1900.18,1515

## Keep-outs
Keep-Out Layer:
  lines w10: 1912.72,1604.41 ccw(c1991.46,1604.41) 1991.46,1525.67 ; 1912.72,5155.59 cw(c1991.46,5155.59) 1991.46,5234.33 ; 13042.62,1525.67 ccw(c13042.62,1604.41) 13121.36,1604.41 ; 13042.62,5234.33 cw(c13042.62,5155.59) 13121.36,5155.59

## Silkscreen, mask and mechanical layers (free items; w line width, h text height)
Top Overlay:
  lines w10: 1900.12,1511.97 13135.32,1511.97 13135.32,2920.01 12997.52,2920.01 12967.09,2924.78 12939.69,2938.78 12917.92,2960.59 12903.94,2987.99 12899.1,3018.48 12903.94,3048.86 12917.92,3076.31 12939.69,3098.07 12967.09,3112.02 12997.52,3116.84 13135.32,3116.84 13135.32,5249.21 1900.12,5249.21 1900.12,3116.84 2037.93,3116.84 2068.31,3112.02 2095.71,3098.07 2117.52,3076.31 2131.46,3048.86 2136.34,3018.42 2131.46,2987.99 2117.52,2960.59 2095.71,2938.78 2068.31,2924.78 2037.87,2920.01 1900.12,2920.01 1900.12,1511.97 ; 2801.22,4144.35 2806,4174.84 2819.94,4202.3 2841.75,4224.05 2869.15,4238.04 2899.64,4242.82 2930.02,4238.04 2957.47,4224.05 2979.17,4202.3 2993.22,4174.84 2998,4144.35 2993.22,4114.02 2979.17,4086.57 2957.47,4064.81 2930.02,4050.81 2899.64,4045.93 2869.15,4050.81 2841.75,4064.81 2819.94,4086.57 2806,4114.02 2801.22,4144.35 ; 12047.21,4144.35 12052.05,4174.84 12066.03,4202.3 12087.8,4224.05 12115.24,4238.04 12145.67,4242.82 12176.07,4238.04 12203.51,4224.05 12225.28,4202.3 12239.22,4174.84 12244.1,4144.35 12239.22,4114.02 12225.28,4086.57 12203.51,4064.81 12176.07,4050.81 12145.67,4045.93 12115.24,4050.81 12087.8,4064.81 12066.03,4086.57 12052.05,4114.02 12047.21,4144.35
  text "VCC MOSI GND" at 6305.18,1980.32 h39.37
  text "rev0" at 6021.21,1865.49 h59.05 r2
  text "ZX64" at 5300.18,1791.58 h196.85
  text "VSS DATA VDD" at 8460.18,1705.32 h39.37
  text "MISO SCK RST" at 6310.18,1695.32 h39.37
  text "RGB_EXT" at 8460.18,1605.55 h68.9
  text "AVR_ISP" at 6290.18,1590.55 h68.9
  text "Forggy0113" at 5300.18,1585.94 h118.11
  text "OpenSource" at 7620.18,1580 h80
Bottom Overlay:
  text "GND MOSI VCC" at 6710.18,1980.32 h39.37
  text "ZX64" at 6315.18,1756.02 h127.95
  text "VDD DATA VSS" at 8885.18,1705.32 h39.37
  text "RST SCK MISO" at 6705.18,1695.32 h39.37
  text "rev0" at 6190.18,1685.47 h59.05
  text "RGB_EXT" at 8880.18,1605.55 h68.9
  text "AVR_ISP" at 6710.18,1590.55 h68.9
  text "OpenSource" at 8290.18,1580 h80

## Text inside footprints (layer, text, board x,y; h text height)
SW1: Bottom Overlay "LED" at 2144.2,5045.35 h39.37
SW2: Bottom Overlay "LED" at 2894.2,5045.35 h39.37
SW3: Bottom Overlay "LED" at 3644.2,5045.35 h39.37
SW4: Bottom Overlay "LED" at 4394.2,5045.35 h39.37
SW5: Bottom Overlay "LED" at 5144.2,5045.35 h39.37
SW6: Bottom Overlay "LED" at 5894.2,5045.35 h39.37
SW7: Bottom Overlay "LED" at 6639.2,5045.35 h39.37
SW8: Bottom Overlay "LED" at 7394.2,5045.35 h39.37
SW9: Bottom Overlay "LED" at 8144.2,5045.35 h39.37
SW10: Bottom Overlay "LED" at 8894.2,5045.35 h39.37
SW11: Bottom Overlay "LED" at 9639.2,5045.35 h39.37
SW12: Bottom Overlay "LED" at 10394.2,5045.35 h39.37
SW13: Bottom Overlay "LED" at 11144.2,5045.35 h39.37
SW14: Bottom Overlay "LED" at 12264.2,5045.35 h39.37
SW15: Bottom Overlay "LED" at 2334.2,4295.35 h39.37
SW16: Bottom Overlay "LED" at 3269.2,4295.35 h39.37
SW17: Bottom Overlay "LED" at 4019.2,4295.35 h39.37
SW18: Bottom Overlay "LED" at 4769.2,4295.35 h39.37
SW19: Bottom Overlay "LED" at 5519.2,4295.35 h39.37
SW20: Bottom Overlay "LED" at 6269.2,4295.35 h39.37
SW21: Bottom Overlay "LED" at 7019.2,4295.35 h39.37
SW22: Bottom Overlay "LED" at 7764.2,4295.35 h39.37
SW23: Bottom Overlay "LED" at 8519.2,4295.35 h39.37
SW24: Bottom Overlay "LED" at 9269.2,4295.35 h39.37
SW25: Bottom Overlay "LED" at 10014.2,4295.35 h39.37
SW26: Bottom Overlay "LED" at 10764.2,4295.35 h39.37
SW27: Bottom Overlay "LED" at 11519.2,4295.35 h39.37
SW28: Bottom Overlay "LED" at 12459.2,4295.35 h39.37
SW29: Bottom Overlay "LED" at 2424.2,3545.36 h39.37
SW30: Bottom Overlay "LED" at 3454.2,3545.36 h39.37
SW31: Bottom Overlay "LED" at 4204.2,3545.36 h39.37
SW32: Bottom Overlay "LED" at 4954.2,3545.36 h39.37
SW33: Bottom Overlay "LED" at 5704.2,3545.36 h39.37
SW34: Bottom Overlay "LED" at 6454.2,3545.36 h39.37
SW35: Bottom Overlay "LED" at 7204.2,3545.36 h39.37
SW36: Bottom Overlay "LED" at 7954.2,3545.36 h39.37
SW37: Bottom Overlay "LED" at 8704.2,3545.36 h39.37
SW38: Bottom Overlay "LED" at 9454.2,3545.36 h39.37
SW39: Bottom Overlay "LED" at 10209.2,3545.36 h39.37
SW40: Bottom Overlay "LED" at 10954.2,3545.36 h39.37
SW41: Bottom Overlay "LED" at 12174.2,3545.36 h39.37
SW42: Bottom Overlay "LED" at 2519.2,2795.36 h39.37
SW43: Bottom Overlay "LED" at 3644.2,2795.36 h39.37
SW44: Bottom Overlay "LED" at 4394.2,2795.36 h39.37
SW45: Bottom Overlay "LED" at 5144.2,2795.36 h39.37
SW46: Bottom Overlay "LED" at 5894.2,2795.36 h39.37
SW47: Bottom Overlay "LED" at 6639.2,2795.36 h39.37
SW48: Bottom Overlay "LED" at 7389.2,2795.36 h39.37
SW49: Bottom Overlay "LED" at 8139.2,2795.36 h39.37
SW50: Bottom Overlay "LED" at 8894.2,2795.36 h39.37
SW51: Bottom Overlay "LED" at 9644.2,2795.36 h39.37
SW52: Bottom Overlay "LED" at 10394.2,2795.36 h39.37
SW53: Bottom Overlay "LED" at 11144.2,2795.36 h39.37
SW54: Bottom Overlay "LED" at 11894.2,2795.36 h39.37
SW55: Bottom Overlay "LED" at 12639.2,2795.36 h39.37
SW56: Bottom Overlay "LED" at 2234.2,2045.36 h39.37
SW57: Bottom Overlay "LED" at 3174.2,2045.36 h39.37
SW58: Bottom Overlay "LED" at 4109.2,2045.36 h39.37
SW59: Bottom Overlay "LED" at 6924.2,2045.36 h39.37
SW60: Bottom Overlay "LED" at 9644.2,2045.36 h39.37
SW61: Bottom Overlay "LED" at 10394.2,2040.36 h39.37
SW62: Bottom Overlay "LED" at 11139.2,2045.36 h39.37
SW63: Bottom Overlay "LED" at 11894.2,2045.36 h39.37
SW64: Bottom Overlay "LED" at 12639.2,2045.36 h39.37
U2: Top Overlay "1" at 8545.98,1926.7 h80 r180; Top Overlay "2" at 8646.98,1935.4 h80 r180; Top Overlay "3" at 8747.78,1935.3 h80 r177